# Altium PCB BaseConnector.PcbDoc
Units mil, origin at the board's own origin, x right, y up, seen from the top; angles counter-clockwise.
Board outline 484.16 x 783.01 mil, 2 copper layers (Top1, Bottom2), stack 14.611 mil thick; 4 components, 6 nets, 37 pads, 2 vias.
Unrouted connection lines stored in the file: 11.
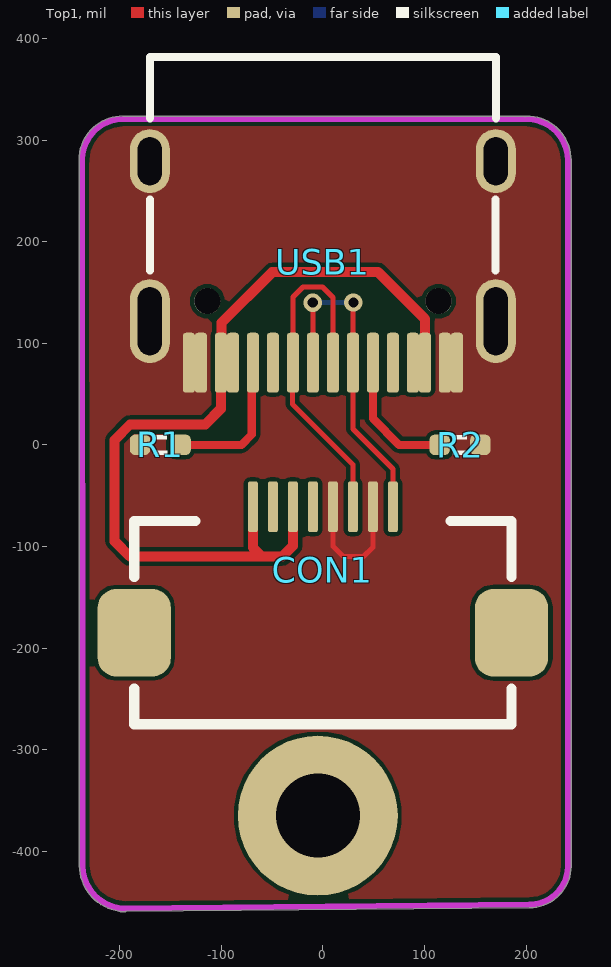
[diagram p0: Top1 view]
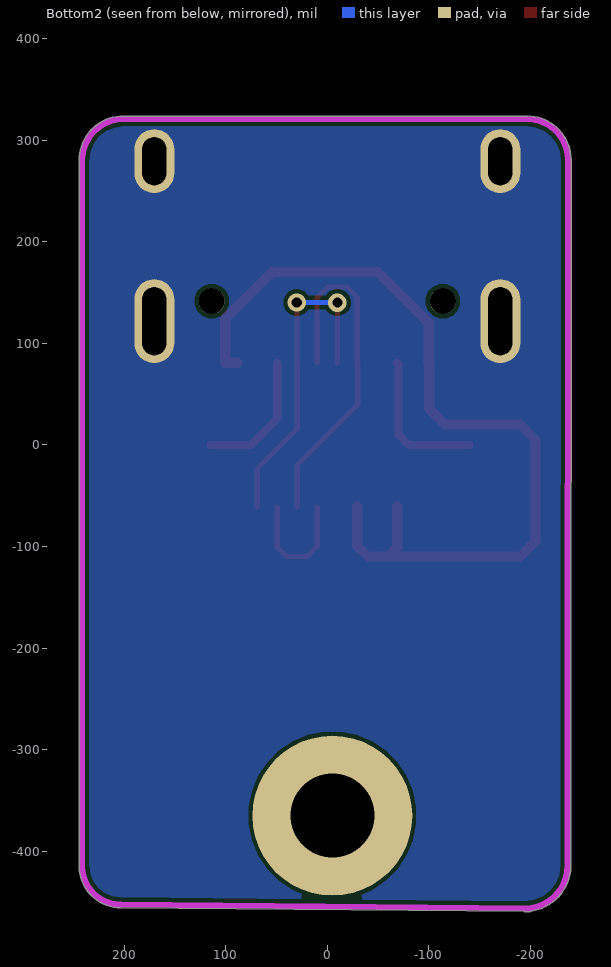
[diagram p1: Bottom2 view, seen from below]
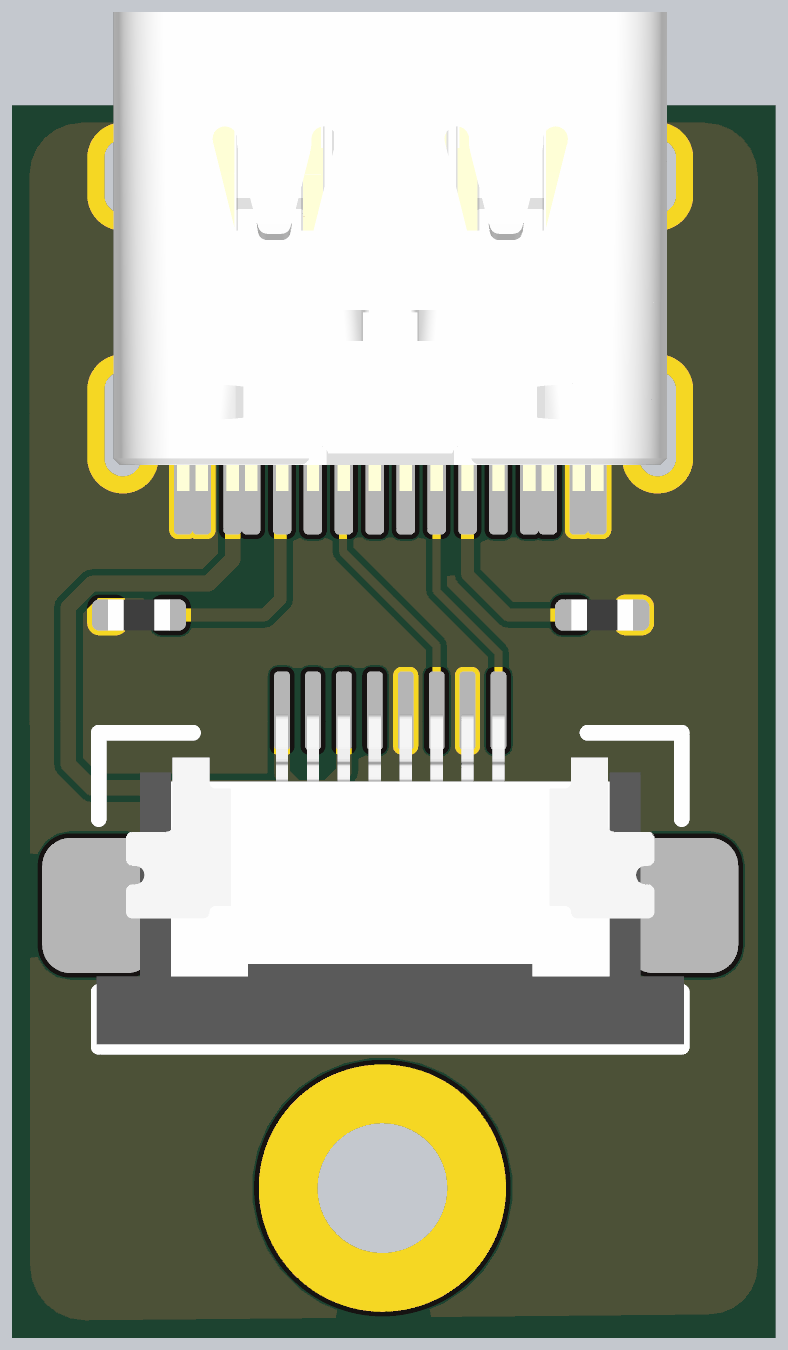
[diagram p2: 3D render of the assembled board from above, using the file's embedded part models]

## Layer stack, top to bottom
Top Solder: solder mask 0.4, Solder Resist, Dk 3.5
Top1: signal copper 1.4
Dielectric 1: prepreg 11.811, PP-006, Dk 4.1
Bottom2: signal copper 1.4
Bottom Solder: solder mask 0.4, Solder Resist, Dk 3.5

## Board outline
-239.58,-414.19 ccw(c-194.4,-414.19) -200.7,-458.93 ccw(c-199.13,-456.35) -199.1,-459.37 -196.02,-459.34 ccw(c-194.4,-414.05) -194.4,-459.37 ccw(c-194.4,-456.35) -193.86,-459.32 203.31,-455.59 ccw(c203.29,-414.64) 244.24,-414.64 ccw(c241.24,-414.64) 244.2,-414.21 ccw(c241.23,-413.78) 244.24,-413.78 244.24,280 ccw(c200.6,280) 200.6,323.64 ccw(c200.6,320.62) 198.72,322.98 ccw(c196.85,320.62) 196.85,323.64 -196.85,323.64 ccw(c-196.85,280.57) -239.92,280.57 ccw(c-236.91,280.57) -239.91,280.28 ccw(c-236.9,280) -239.92,280 -239.58,-354.79

## Design rules (kind name [scope] priority, off if disabled: settings)
Clearance [All] p1: gap=4 ignorepadtopadclearanceinfootprint=FALSE
ComponentClearance [All] p1: gap=0 collisioncheckmode=3 verticalgap=0 showdistances=FALSE
DiffPairsRouting [All] p1: maxlimit=9 minlimit=9 mostfreqgap=9 toplayer_minwidth=4 toplayer_maxwidth=4 toplayer_prefwidth=4 bottomlayer_minwidth=4 bottomlayer_maxwidth=4 bottomlayer_prefwidth=4 maxuncoupledlength=500
FanoutControl Fanout_BGA [All] p1: bgadir=Out bgaviamode=Centered fanoutstyle=Auto fanoutdirection=Alternating viagrid=1 // Fanout_BGA (Default Rule)
HoleSize [All] p1: absolutevalues=TRUE maxlimit=10000 minlimit=8 maxpercent=80.000 minpercent=20.000
MinimumSolderMaskSliver [All] p1 off: minsoldermaskwidth=2
PlaneClearance [All] p1: clearance=8
PlaneConnect [All] p1: planeconnectstyle=Direct reliefexpansion=20 reliefentries=4 reliefconductorwidth=10 reliefairgap=10
PolygonConnect [All] p1: connectstyle=Direct reliefconductorwidth=10 reliefentries=4 polygonreliefangle="90 Angle" airgapwidth=10
RoutingVias [All] p1: holewidth=8 width=16 viastyle="Through Hole" minholewidth=6 minwidth=12 maxholewidth=28 maxwidth=50
SilkToSilkClearance [All] p1: silktosilkclearance=0
SilkToSolderMaskClearance [IsPad] p1: minsilkscreentomaskgap=0 clearancetoexposedcopper=TRUE
SolderMaskExpansion [All] p1: expansion=3 istentingtop=FALSE
Width [All] p1: maxlimit=10000 minlimit=4 preferedwidth=4
21 further rules are at their usual default settings.

## Components (designator, comment, footprint, x,y, rotation, side; value= is the part's Value field where it differs from the comment)
CON1 "FFC_0.5_8" FFC_0.5_8 0,-150 r0 top
R1 "5.1K" RES_0402 -160,0 r0 top value=22R
R2 "5.1K" RES_0402 135,0 r0 top value=22R
USB1 "Type-C" Type-C-TOP 0,180 r90 top

## Footprints (in the part's own frame and the unit in brackets; to place one, negate y for a bottom-side part, rotate by r counter-clockwise, add the part's x,y. Pads: shape width x height; smd on the part's side, far side on the other; paste and mask are expansions set on the pad)
FFC_0.5_8 [mil]
  rrect50% 72x86 smd: 0(-185.63,-35) 0(185.63,-35)
  rrect50% 10x50 smd: 1(-68.9,89) 2(-49.21,89) 3(-29.53,89) 4(-9.84,89) 5(9.84,89) 6(29.53,89) 7(49.21,89) 8(68.9,89)
  silkscreen extent -186,-125 186,75, body extent -187,-124 187,87, height 82
RES_0402 [mil]
  rrect50% 20x20 smd: 1(-20,0) 2(20,0)
  silkscreen extent -6,-10 6,10, body extent -20,-10 20,10, height 14
Type-C-TOP [mm]
  round 0.65 hole 0.65: 0(-0.98,2.89) 0(-0.98,-2.89)
  oval 1.6x1 hole 0.6 slot 1.2 at 0 deg: 1(2.52,4.325) 2(2.52,-4.325)
  oval 2.1x1 hole 0.6 slot 1.7 at 0 deg: 3(-1.48,-4.325) 4(-1.48,4.325)
  rrect50% 1.5x0.3 smd: A1(-2.52,-3.35) A4(-2.52,-2.55) A5(-2.52,-1.25) A6(-2.52,-0.25) A7(-2.52,0.25) A8(-2.52,1.25) A9(-2.52,2.55) A12(-2.52,3.35) B1(-2.52,3.05) B4(-2.52,2.25) B5(-2.52,1.75) B6(-2.52,0.75) B7(-2.52,-0.75) B8(-2.52,-1.75) B9(-2.52,-2.25) B12(-2.52,-3.05)
  silkscreen extent -0.22,-4.33 5.12,4.33, body extent -2.57,-4.48 5.18,4.48, height 3.26

## Part data
CON1: "FFC"
R1 R2: library part 电阻-0402, "Resistor"
USB1: library part USB-Type-C-TOP

## Free pads (board coordinates)
  round 157.48 hole 82.68: ""(-5,-365)

## Via types
v1: diameter 18, hole 10, Top1 to Bottom2, tented both sides, 2 vias

## Nets (pads, with @x,y where several pads share a name; then routed paths per layer and width w, separated by ;. In a path a pad name is that pad's centre, name@x,y a point inside that pad or via, vN(x,y) a via of type N, cw(c..) or ccw(c..) an arc to the next point about the centre after c; other vN are vias at no path point)
GND: CON1.5 CON1.7 R1.1 R2.2 USB1.1 USB1.2 USB1.3 USB1.4 USB1.A1 USB1.A12 USB1.B1 USB1.B12 | length 126
  Top1 w5: CON1.5 9.84,-99.84 20,-110 40,-110 49.21,-100.79 CON1.7
NetR1_2: R1.2 USB1.B5 | length 145.4
  Top1 w8: R1.2 -80,0 -70,10 -70,79.69 USB1.B5
NetR2_1: R2.1 USB1.A5 | length 131.5
  Top1 w8: USB1.A5 49.21,25.79 75,0 R2.1
USB_DM_1: CON1.8 USB1.A7 USB1.B7 | length 316.6
  Top1 w5: v1(-9.92,139.92) USB1.A7 USB1.A7 ; v1(30,140) 29.76,139.76 29.76,81.02 USB1.B7 29.53,15.47 68.9,-23.9 CON1.8
  Bottom2 w5: v1(-9.92,139.92) v1(-9.92,139.92) 29.96,139.96 v1(30,140)
USB_DP_1: CON1.6 USB1.A6 USB1.B6 | length 343.6
  Top1 w5: USB1.A6 9.84,119.84 10,120 10,145 -0.42,155.42 -19.58,155.42 -29.53,145.47 USB1.B6 -30,80.31 -30,40 29.53,-19.53 CON1.6
VBUS: CON1.1 CON1.3 USB1.A4 USB1.A9 USB1.B4 USB1.B9 | length 874.3
  Top1 w10: CON1.1 -68.9,-101.1 -60,-110 ; CON1.3 -29.53,-99.53 -40,-110 -60,-110 ; USB1.B9 USB1.A4 100.39,123.98 54.37,170 -50,170 -99.84,120.16 -99.84,81.34 USB1.A9 -100.39,35.39 -115.79,20 -189.8,20 -205,4.8 -205,-95 -190,-110 -60,-110
pads on no net: CON1.0 CON1.2 CON1.4 USB1.0 USB1.A8 USB1.B8

## Polygon pours and split planes (outlines as drawn)
GND on Top1 "GND_L01_P000" (solid, remove dead copper, pour order 0): -440,320 440,320 440,-505 -440,-505
GND on Bottom2 "GND_L02_P002" (solid, remove dead copper, pour order 2): -440,320 440,320 440,-505 -440,-505

## Keep-outs
Keep-Out Layer:
  lines w6: -236.91,280 -236.57,-354.78 -236.57,-414.19 ccw(c-194.4,-414.19) -194.4,-456.35 ; -236.91,280.57 cw(c-196.85,280.57) -196.85,320.62 196.85,320.62 200.6,320.62 cw(c200.6,280) 241.22,280 241.22,-366.35 241.22,-413.78 ; -199.13,-456.35 203.29,-452.57 ccw(c203.29,-414.64) 241.22,-414.64

## Silkscreen, mask and mechanical layers (free items; w line width, h text height)
Mechanical 1:
  the board outline again, w6